# Altium PCB 24P_TO_15P_FPC_CSI_ADAPTER.PcbDoc
Units mm, origin at the board's own origin, x right, y up, seen from the top; angles counter-clockwise.
Board outline 34 x 38 mm, 4 copper layers (Top Layer, Mid Layer 1, Mid Layer 2, Bottom Layer), stack 1.586 mm thick; 15 components, 16 nets, 90 pads, 40 vias.
Unrouted connection lines stored in the file: 6.
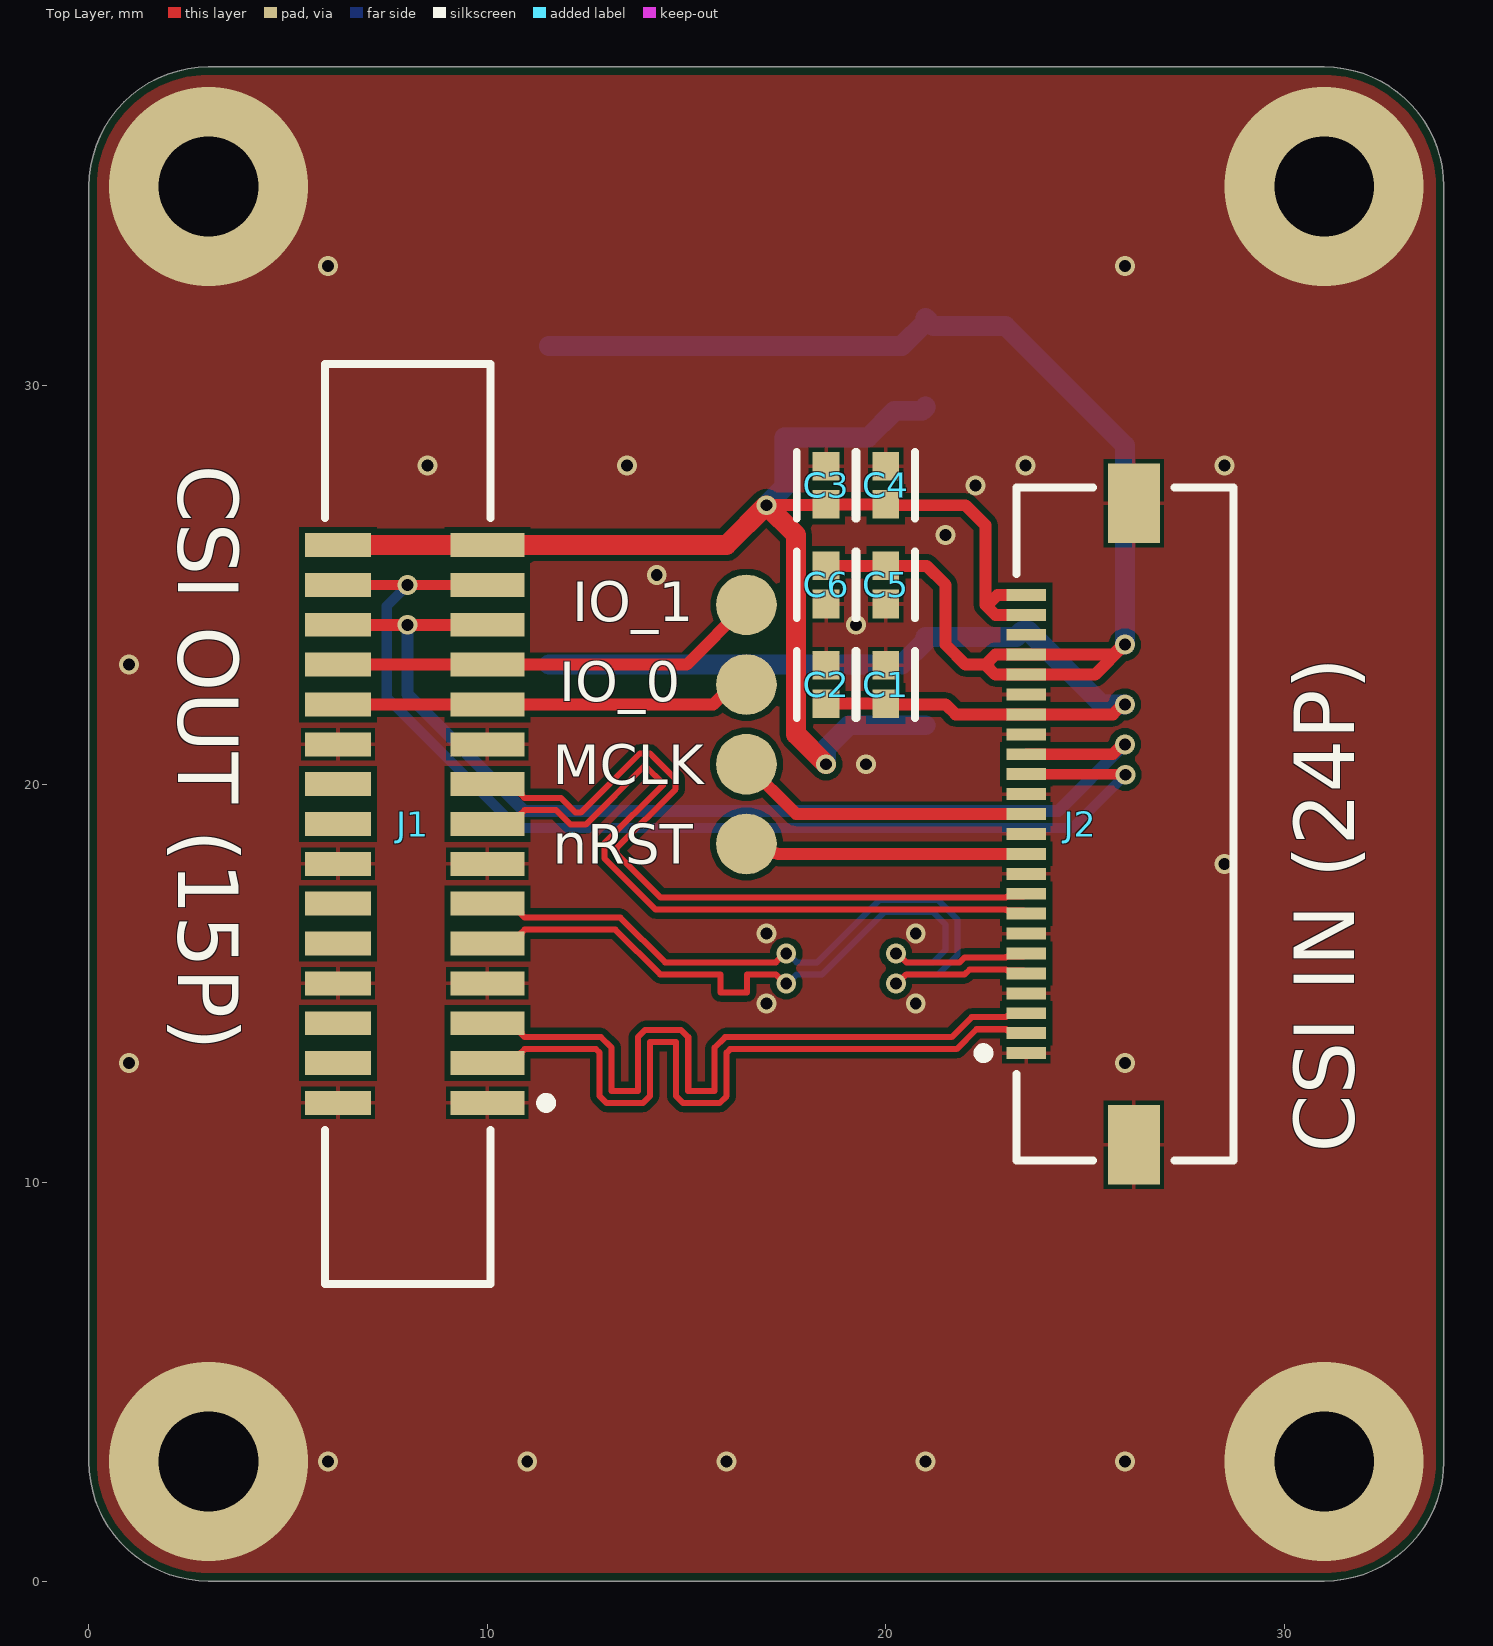
[diagram p0: Top Layer view]
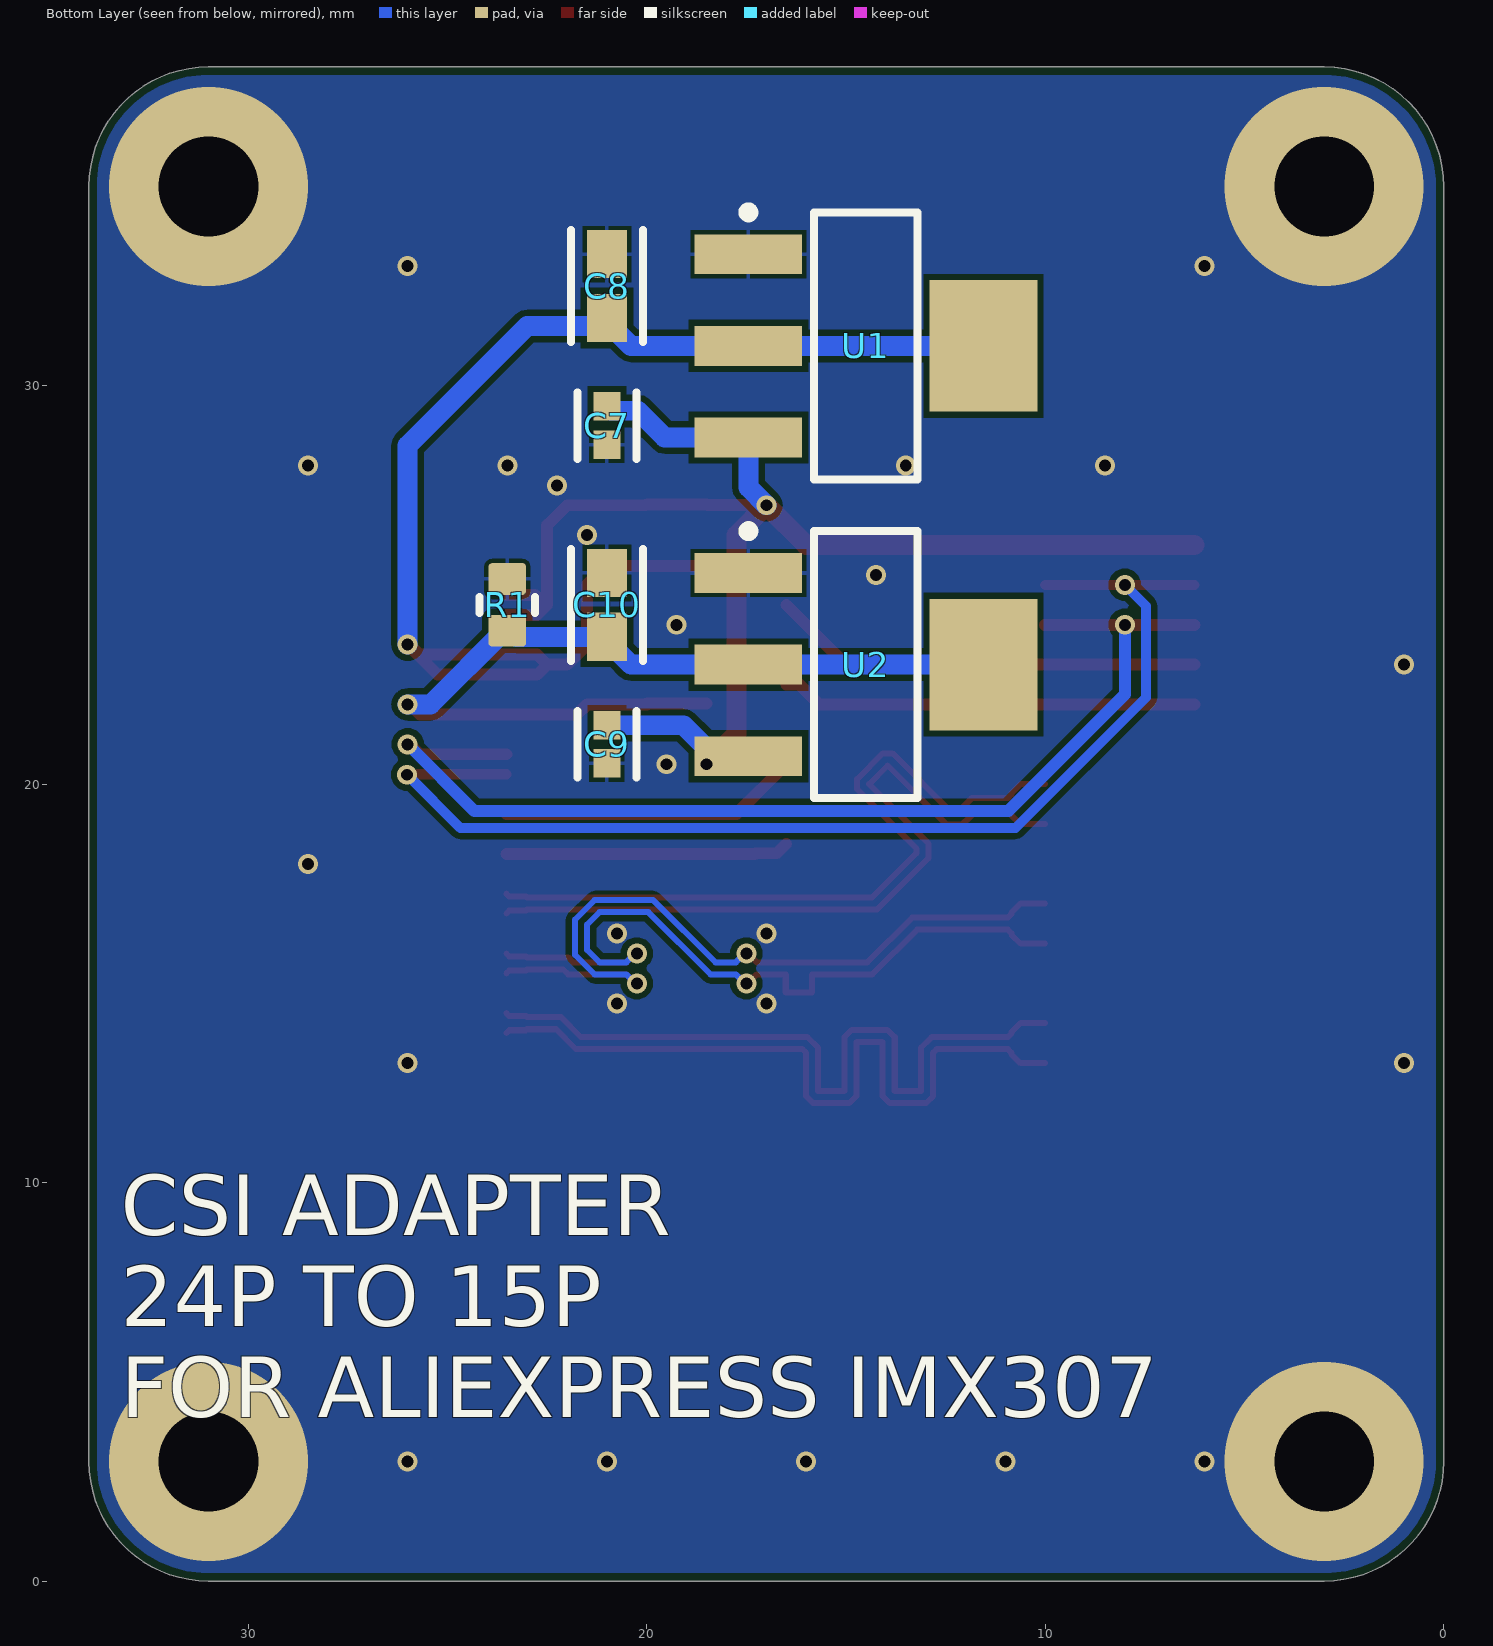
[diagram p1: Bottom Layer view, seen from below]
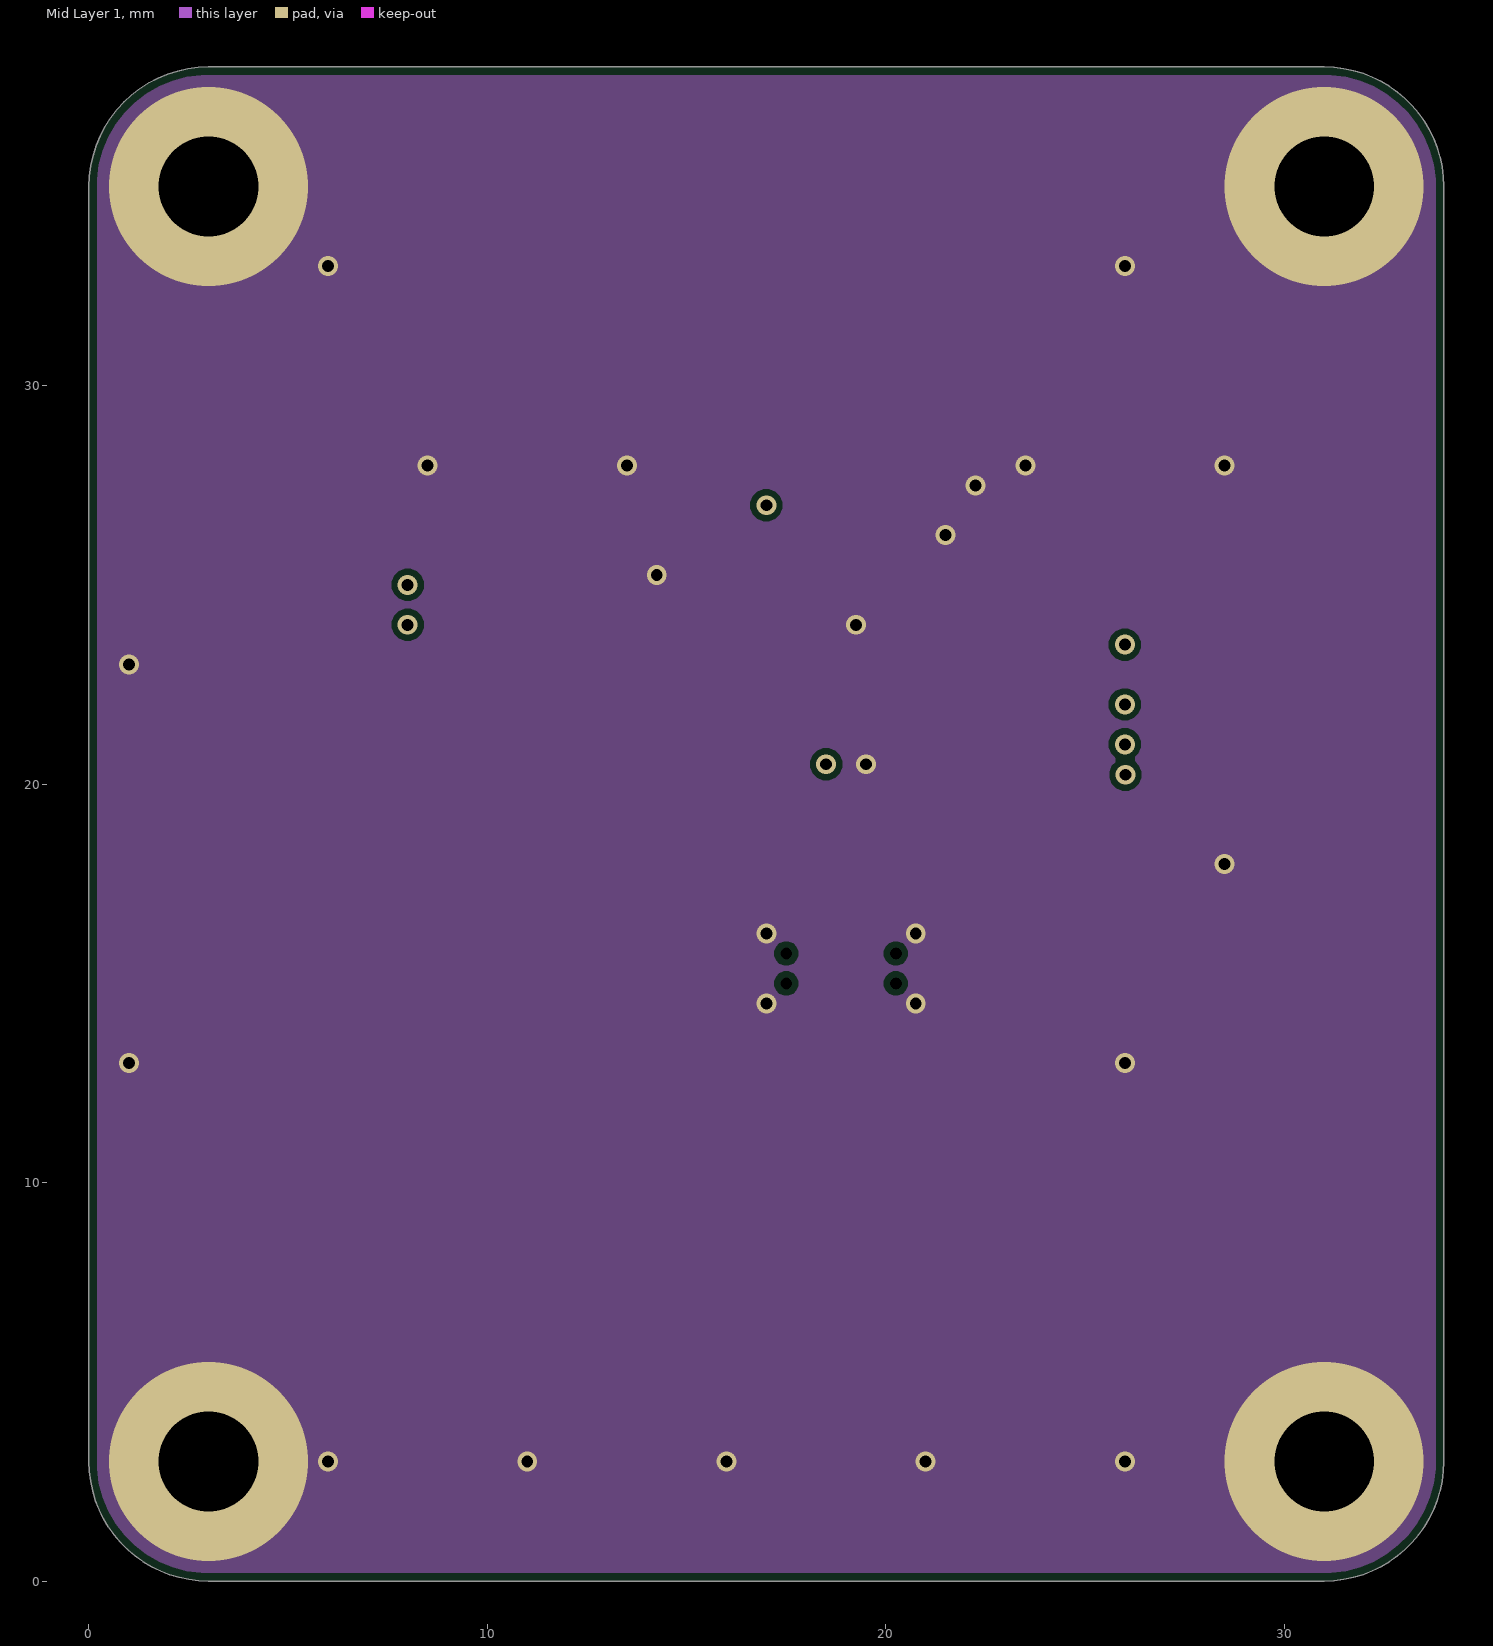
[diagram p2: Mid Layer 1]
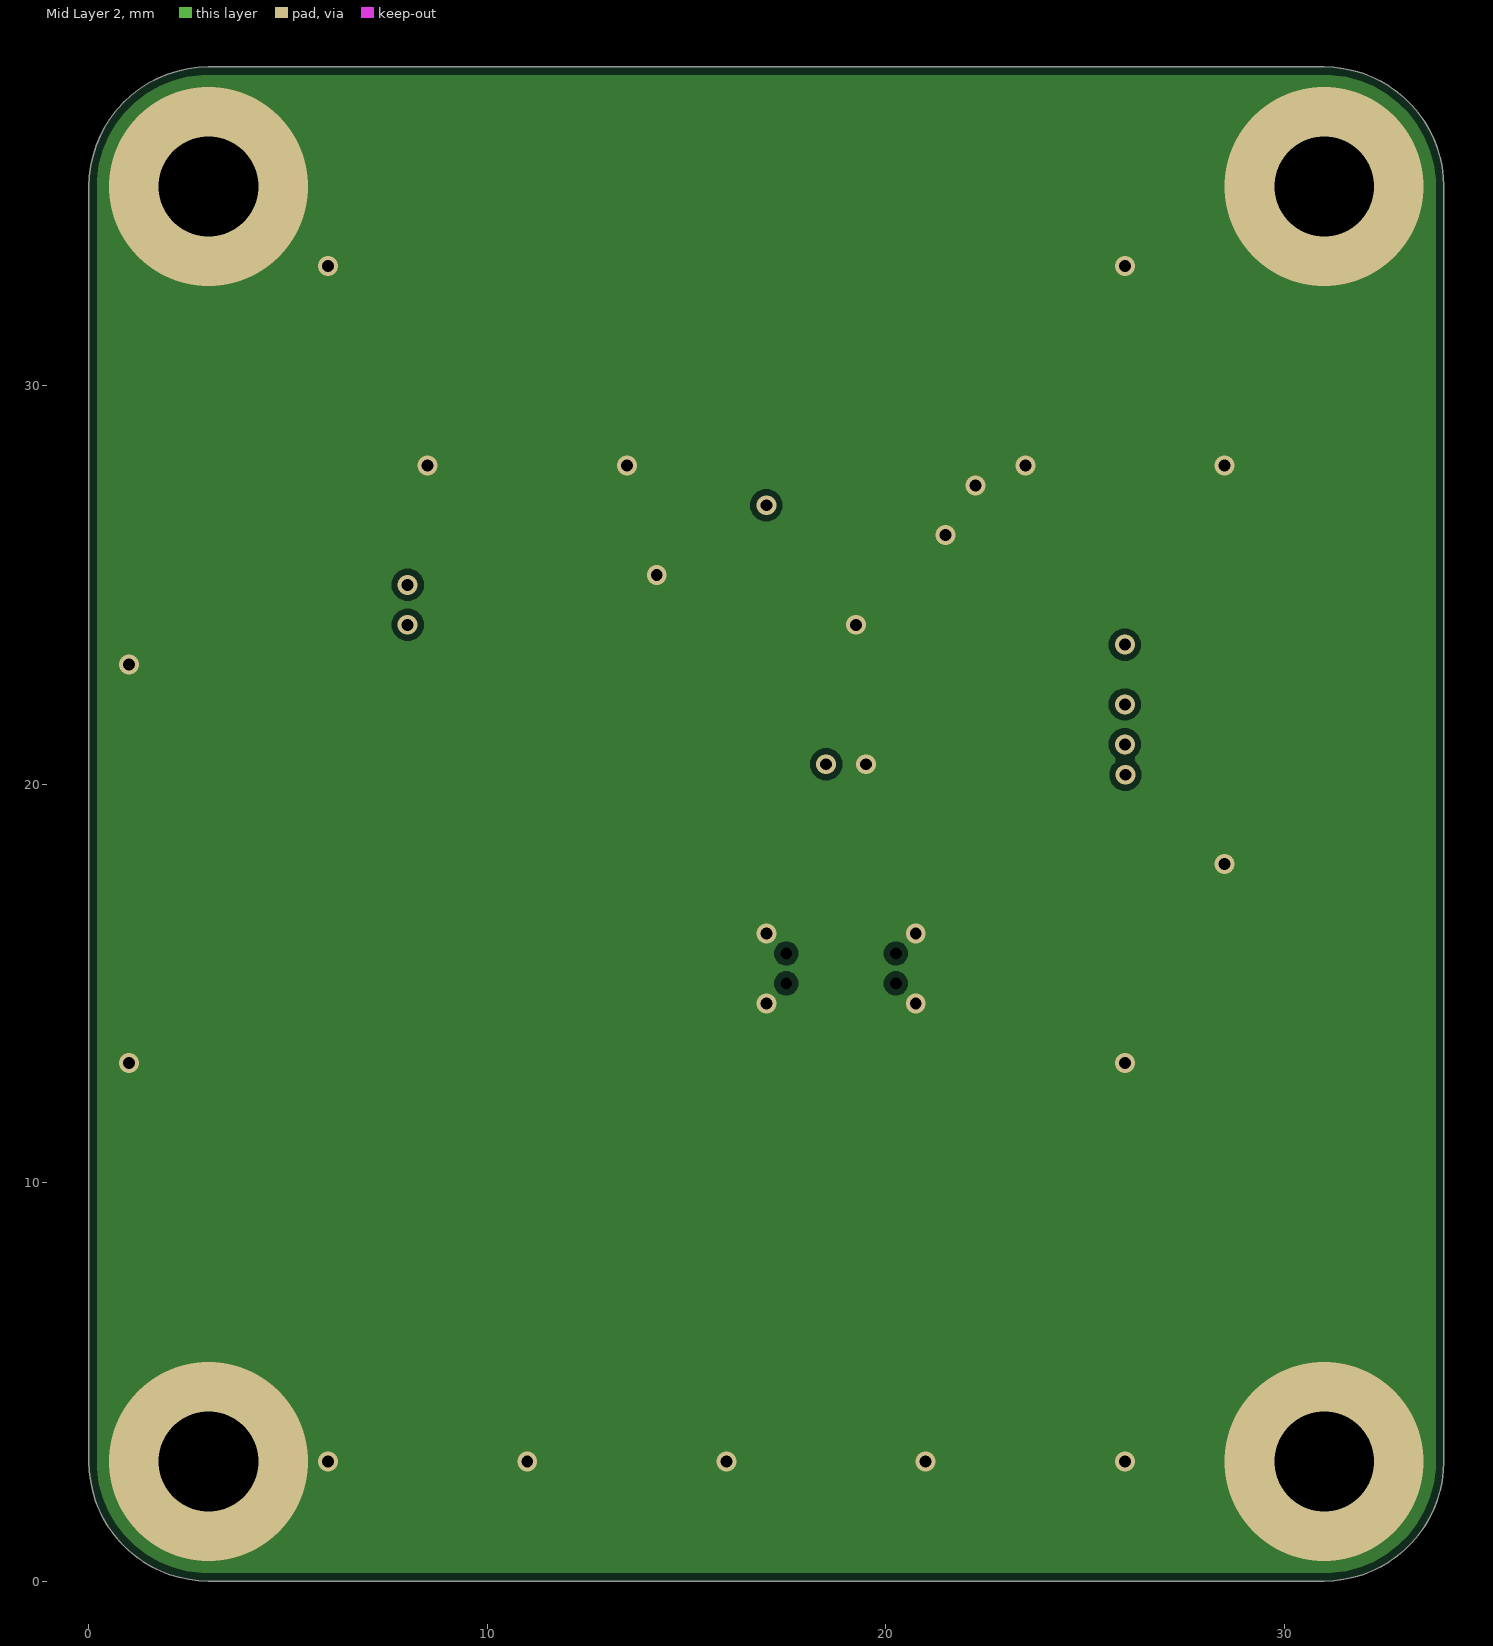
[diagram p3: Mid Layer 2]
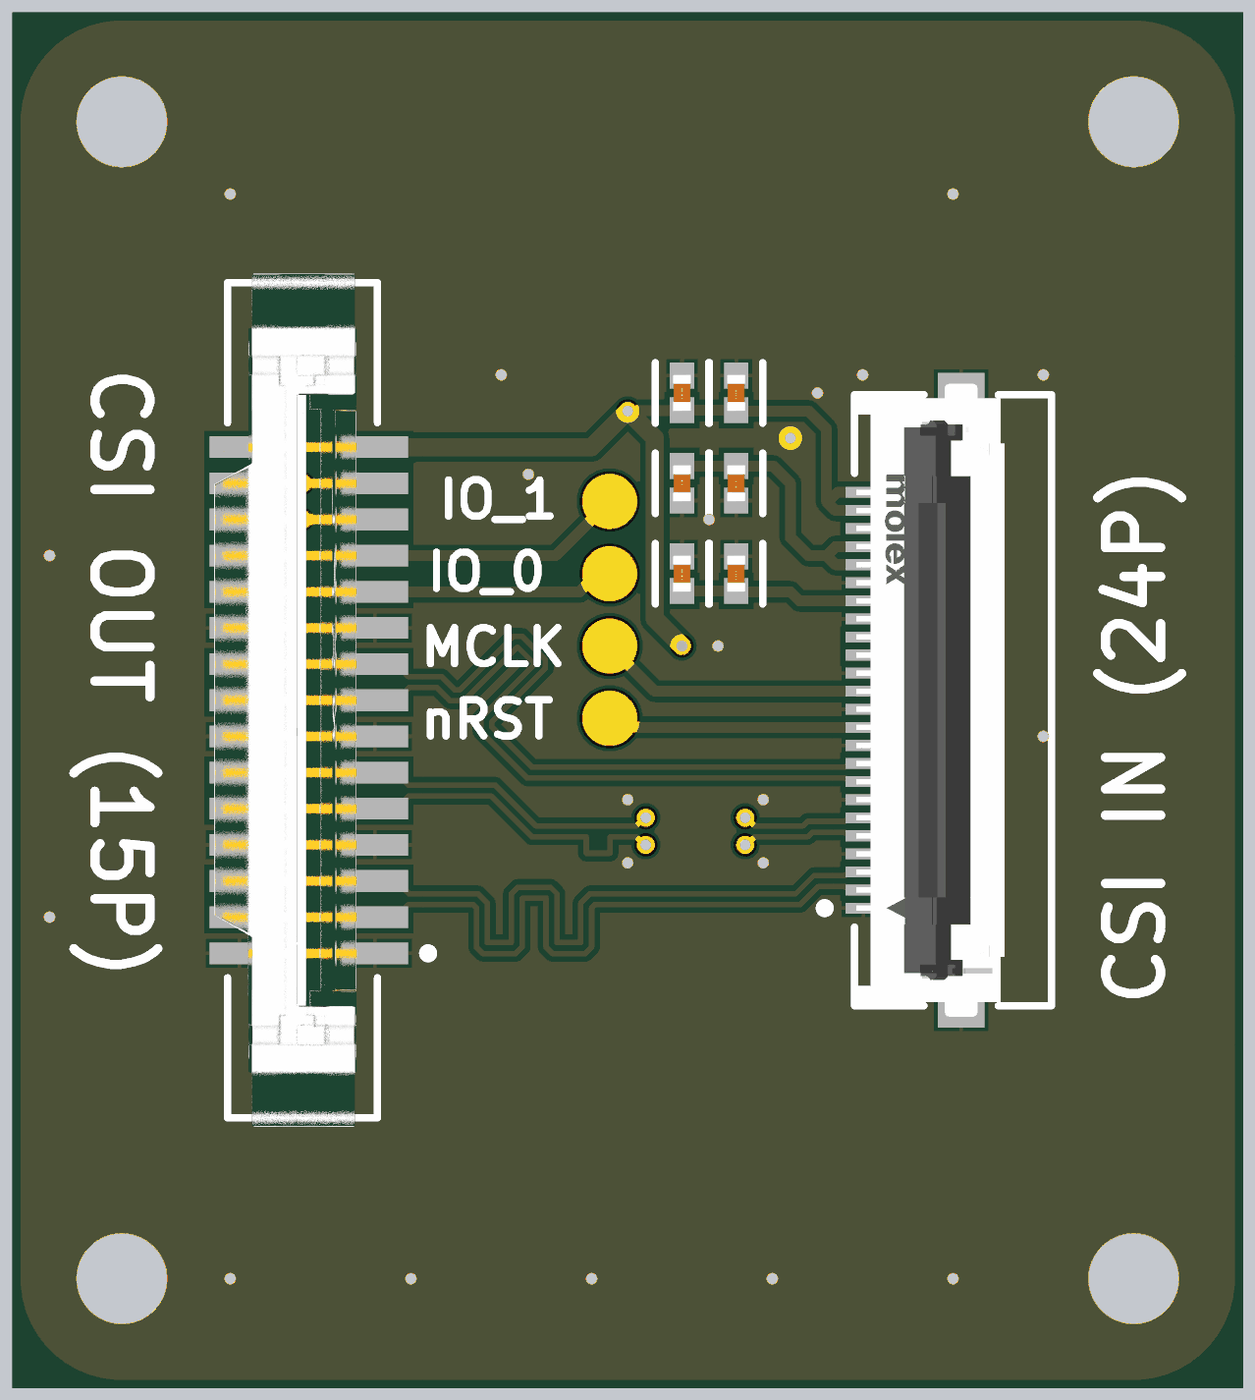
[diagram p4: 3D render of the assembled board from above, using the file's embedded part models]
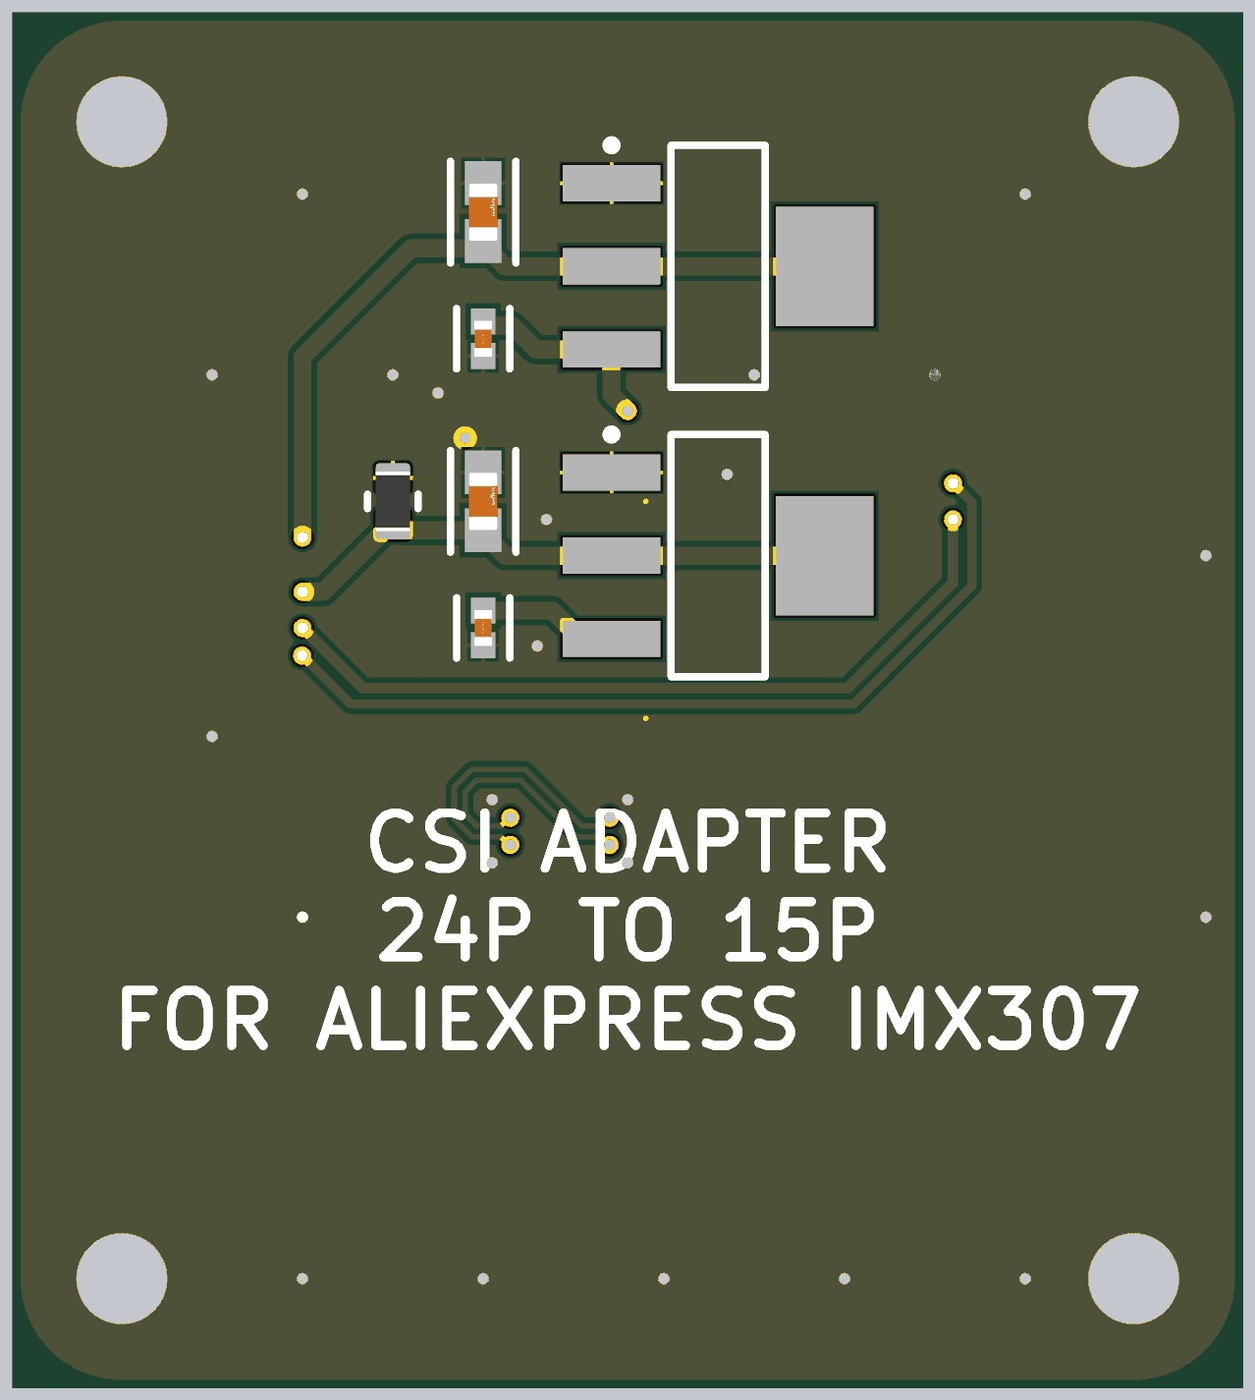
[diagram p5: 3D render of the assembled board from below, using the file's embedded part models]

## Layer stack, top to bottom
Top Solder: solder mask 0.0127, Solder Resist, Dk 3.8
Top Layer: signal copper 0.035
Dielectric 1: prepreg 0.2104, 7628, Dk 4.6
Mid Layer 1: signal copper 0.0152
Core: core 1.065, FR-4, Dk 4.5
Mid Layer 2: signal copper 0.0152
Dielectric 2: prepreg 0.2104, 7628, Dk 4.6
Bottom Layer: signal copper 0.035
Bottom Solder: solder mask 0.0127, Solder Resist, Dk 3.8

## Board outline
0,3 ccw(c3,3) 3,0 31,0 ccw(c31,3) 34,3 34,35 ccw(c31,35) 31,38 3,38 ccw(c3,35) 0,35

## Design rules (kind name [scope] priority, off if disabled: settings)
BoardOutlineClearance [All] p1: gap=0.2 ignorepadtopadclearanceinfootprint=FALSE
Clearance [All] p1: gap=0.15 ignorepadtopadclearanceinfootprint=FALSE
ComponentClearance [All] p1: gap=0.102 collisioncheckmode=3 verticalgap=0.102 showdistances=TRUE
DiffPairsRouting [InDifferentialPairClass('CSI')] p1: maxlimit=0.15 minlimit=0.127 mostfreqgap=0.15 toplayer_mingap=0.15 toplayer_minwidth=0.152 toplayer_maxwidth=0.152 toplayer_prefwidth=0.152 midlayer1_maxgap=0.127 midlayer1_prefgap=0.127 midlayer1_minwidth=0.107 midlayer1_maxwidth=0.107 midlayer1_prefwidth=0.107 midlayer2_maxgap=0.127 midlayer2_prefgap=0.127 midlayer2_minwidth=0.107 midlayer2_maxwidth=0.107 midlayer2_prefwidth=0.107 bottomlayer_mingap=0.15 bottomlayer_minwidth=0.152 bottomlayer_maxwidth=0.152 bottomlayer_prefwidth=0.152 impedanceprofiledriven=TRUE impedanceprofileid={FFC9BC41-F732-48F3-88DE-656A0ADEF5C8} impedanceprofilevalue=100.000000 maxuncoupledlength=12.7
DiffPairsRouting DiffPairsRouting_1 [All] p2: maxlimit=0.254 minlimit=0.254 mostfreqgap=0.254 toplayer_minwidth=0.381 toplayer_maxwidth=0.381 toplayer_prefwidth=0.381 midlayer1_minwidth=0.381 midlayer1_maxwidth=0.381 midlayer1_prefwidth=0.381 midlayer2_minwidth=0.381 midlayer2_maxwidth=0.381 midlayer2_prefwidth=0.381 bottomlayer_minwidth=0.381 bottomlayer_maxwidth=0.381 bottomlayer_prefwidth=0.381 maxuncoupledlength=12.7
Height [All] p1: minheight=0 maxheight=1816.048 prefheight=12.7
HoleSize [All] p1: absolutevalues=TRUE maxlimit=6.3 minlimit=0.2 maxpercent=80.000 minpercent=20.000
HoleToHoleClearance [All] p1: gap=0.25 allowstackedmicrovias=FALSE
MatchedLengths CSI_INTER [InDifferentialPairClass('CSI')] p1: tolerance=25.4 checknetsindiffpair=FALSE checkdiffpairvsdiffpair=TRUE checkxsignals=TRUE checkothers=TRUE usedelayunits=TRUE delaytolerance=5.000000
MatchedLengths CSI_INTRA [InDifferentialPairClass('CSI')] p2: tolerance=25.4 checknetsindiffpair=TRUE checkdiffpairvsdiffpair=FALSE checkxsignals=FALSE checkothers=FALSE usedelayunits=TRUE delaytolerance=1.000000
MinimumAnnularRing [All] p1: minimumring=0.076
MinimumSolderMaskSliver [All] p1: minsoldermaskwidth=0
PlaneClearance [All] p1: clearance=0.102
PlaneConnect PlaneConnectPowerPads [InPadClass('PowerPads')] p1: planeconnectstyle=Direct reliefexpansion=0.508 reliefentries=4 reliefconductorwidth=0.254 reliefairgap=0.254
PlaneConnect [All] p2: pad.planeconnectstyle=Relief pad.reliefexpansion=0.3 pad.reliefentries=4 pad.reliefconductorwidth=0.102 pad.reliefairgap=0.102 via.planeconnectstyle=Direct via.reliefexpansion=0.3 via.reliefentries=4 via.reliefconductorwidth=0.127 via.reliefairgap=0.127
PolygonConnect PolygonConnectPowerPads [All vs (InPadClass('PowerPads'))] p1: connectstyle=Direct reliefconductorwidth=0.254 reliefentries=4 polygonreliefangle="90 Angle" airgapwidth=0.254
PolygonConnect [All] p2: thpad.connectstyle=Relief thpad.reliefconductorwidth=0.102 thpad.reliefentries=4 thpad.polygonreliefangle="90 Angle" thpad.airgapwidth=0.102 smdpad.connectstyle=Relief smdpad.reliefconductorwidth=0.102 smdpad.reliefentries=4 smdpad.polygonreliefangle="90 Angle" smdpad.airgapwidth=0.102 via.connectstyle=Direct via.reliefconductorwidth=0.127 via.reliefentries=4 via.polygonreliefangle="90 Angle" via.airgapwidth=0.127
RoutingVias [All] p1: holewidth=0.2 width=0.45 viastyle="Through Hole" minholewidth=0.2 minwidth=0.45 maxholewidth=6.3 maxwidth=6.55
SilkToSilkClearance [All] p1: silktosilkclearance=0
SilkToSolderMaskClearance [IsPad] p1: minsilkscreentomaskgap=0.102 clearancetoexposedcopper=TRUE
SolderMaskExpansion [All] p1: expansion=0.075 istentingtop=FALSE
SupplyNets "Schematic Supply Nets_1" [InNet('3V3_AUX')] p1: voltage=0.000
SupplyNets "Schematic Supply Nets" [InNet('GND')] p2: voltage=0.000
Width [All] p1: maxlimit=1816.048 minlimit=0.102 preferedwidth=0.102
20 further rules are at their usual default settings.

## Classes and differential pairs
differential pair class CSI: CSI_CK CSI_D0 CSI_D1
differential pair CSI_D1: +CSI_D1_P -CSI_D1_N
differential pair CSI_D0: +CSI_D0_P -CSI_D0_N
differential pair CSI_CK: +CSI_CK_P -CSI_CK_N

## Components (designator, comment, footprint, x,y, rotation, side; value= is the part's Value field where it differs from the comment)
C1 "100n" FP-0402-L_1_0_0_05-W_0_5-IPC_A 20,22.5 r270 top
C2 "10u" FP-0402-L_1_0_0_05-W_0_5-IPC_A 18.5,22.5 r270 top
C3 "10u" FP-0402-L_1_0_0_05-W_0_5-IPC_A 18.5,27.5 r270 top
C4 "100n" FP-0402-L_1_0_0_05-W_0_5-IPC_A 20,27.5 r270 top
C5 "100n" FP-0402-L_1_0_0_05-W_0_5-IPC_A 20,25 r90 top
C6 "10u" FP-0402-L_1_0_0_05-W_0_5-IPC_A 18.5,25 r90 top
C7 "100n" FP-0402-L_1_0_0_05-W_0_5-IPC_A 21,29 r90 bottom
C8 "GRM188R60J106ME47D" FP-GRM188-0_1-e0_2_0_55-IPC_A 21,32.5 r90 bottom
C9 "100n" FP-0402-L_1_0_0_05-W_0_5-IPC_A 21,21 r90 bottom
C10 "GRM188R60J106ME47D" FP-GRM188-0_1-e0_2_0_55-IPC_A 21,24.5 r90 bottom
J1 "1-1734248-5" FP-1-1734248-5-MFG 8,19 r270 top
J2 "505110-2491" FP-505110-2491-MFG 26,19 r90 top
R1 "120" R0603B 23.5,24.5 r270 bottom
U1 "LD1117S18TR" SOT-223_M 14.5,31 r180 bottom
U2 "LD1117S12TR" SOT-223_M 14.5,23 r180 bottom

## Footprints (in the part's own frame and the unit in brackets; to place one, negate y for a bottom-side part, rotate by r counter-clockwise, add the part's x,y. Pads: shape width x height; smd on the part's side, far side on the other; paste and mask are expansions set on the pad)
FP-1-1734248-5-MFG [mm]
  rect 0.6x1.65 smd paste+0 mask+0: 1(7,-1.75) 2(6,-1.75) 3(5,-1.75) 4(4,-1.75) 5(3,-1.75) 6(2,-1.75) 7(1,-1.75) 8(0,-1.75) 9(-1,-1.75) 10(-2,-1.75) 11(-3,-1.75) 12(-4,-1.75) 13(-5,-1.75) 14(-6,-1.75) 15(-7,-1.75)
  rect 0.6x1.85 smd paste+0 mask+0: 1(7,2) 2(6,2) 3(5,2) 4(4,2) 5(3,2) 6(2,2) 7(1,2) 8(0,2) 9(-1,2) 10(-2,2) 11(-3,2) 12(-4,2) 13(-5,2) 14(-6,2) 15(-7,2)
  silkscreen extent -11.55,-2.07 11.55,3.6, body extent -11.65,-2.67 11.65,3.02, height 0.25
FP-0402-L_1_0_0_05-W_0_5-IPC_A [mm]
  rect 0.715x0.672 smd paste+0 mask+0: 1(-0.479,0) 2(0.479,0)
  silkscreen extent -0.84,-0.74 0.84,0.74, body extent -1.04,-0.54 1.04,0.54, height 0.25
FP-505110-2491-MFG [mm]
  rect 0.3x1 smd paste+0 mask+0: 1(-5.75,2.475) 2(-5.25,2.475) 3(-4.75,2.475) 4(-4.25,2.475) 5(-3.75,2.475) 6(-3.25,2.475) 7(-2.75,2.475) 8(-2.25,2.475) 9(-1.75,2.475) 10(-1.25,2.475) 11(-0.75,2.475) 12(-0.25,2.475) 13(0.25,2.475) 14(0.75,2.475) 15(1.25,2.475) 16(1.75,2.475) 17(2.25,2.475) 18(2.75,2.475) 19(3.25,2.475) 20(3.75,2.475) 21(4.25,2.475) 22(4.75,2.475) 23(5.25,2.475) 24(5.75,2.475)
  rect 2x1.3 smd paste+0 mask+0: 25(-8.05,-0.225) 26(8.05,-0.225)
  silkscreen extent -8.45,-2.73 8.45,3.67, body extent -9.15,-2.83 9.15,3.08, height 0.25
FP-GRM188-0_1-e0_2_0_55-IPC_A [mm]
  rect 1.208x1.012 smd paste+0 mask+0: 1(-0.802,0) 2(0.802,0)
  silkscreen extent -1.41,-0.91 1.41,0.91, body extent -0.8,-0.4 0.8,0.4, height 0.9
R0603B [mm] "Chip Resistor, 0603, 2-Leads, Body 1.58x0.85mm, IPC Medium Density"
  rrect25% 0.8x0.95 smd: 1(-0.65,0) 2(0.65,0)
  silkscreen extent -0.2,-0.7 0.2,0.7, body extent -0.82,-0.48 0.82,0.48, height 0.5
SOT-223_M [mm] "SOT223, 4-Leads, Body 6.5x3.5mm, Pitch 2.3mm, Lead Span 7mm, IPC Low Density"
  rect 2.7x1 smd: 1(-2.95,2.3) 2(-2.95,0) 3(-2.95,-2.3)
  rect 2.7x3.3 smd: 4(2.95,0)
  silkscreen extent -3.08,-3.35 1.3,3.47, body extent -1.85,-3.35 1.85,3.35, height 1.8

## Part data
C1 C2 C3 C4 C5 C6 C7 C9: library part CMP-001-00058-1, "LARGE PADS, 0402 CAP, CHANGE COMMENT TO MATCH REAL P/N", Capacitor Type=Ceramic, Case/Package=0402, Max Operating Temperature=85°C, Min Operating Temperature=-55°C, Mounting Technology="Surface Mount", Pins=2, RoHS Compliant=Yes
C8 C10: library part CMP-2006-02792-2, "Chip Multilayer Ceramic Capacitors for General Purpose, 0603, 10uF, X5R, 15%, 20%, 6.3V", Capacitance=10uF, Case Code (Imperial)=0603, Case Code (Metric)=1608, Dielectric=X5R, Max Operating Temperature=85°C, Min Operating Temperature=-55°C, Package Quantity=4000, Tolerance=20%, Voltage=6.3V, Case/Package=0603, Depth=0.8mm, Height=0.8mm, Lead Free="Lead Free", Length=1.6mm, Material=Ceramic, Mount="Surface Mount", Packaging="Tape and Reel", Radiation Hardening=No, REACH SVHC="No SVHC", Termination=SMD/SMT, Thickness=0.035inch, Voltage Rating=6.3V, Voltage Rating (DC)=6.3V, Width=0.031inch
J1: library part CMP-03368-000001-1, "CONN FPC VERT 15POS 1.00MM SMD", Current Rating=1A, Manufacturer=TE, Package=0, Temperature="-20°C to +85°C", Temperature Range High=+85°C, Temperature Range Low=-20°C, Voltage Rating=125V, Automotive=No, Category=Conn, ComponentLink2Description=Datasheet, ComponentLink2URL=https://www.te.com/commerce/DocumentDelivery/DDEController?Action=showdoc&DocId=Customer+Drawing%7F1734248%7FE1%7Fpdf%7FEnglish%7FENG_CD_1734248_E1__.pdf%7F1-1734248-5, Conn Gender=Female, Conn Orientation=Vertical, Contact Material=Gold,Nickel, Device Class L1=Connectors, Device Class L2="FFC / FPC", Device Class L3=unset, Digikey Description="CONN FPC VERT 15POS 1.00MM SMD", Height=8mm, Is Female=yes, Lead Free=Yes, Manufacturer Part Number=1-1734248-5, Mounting Type="Surface Mount", Mouser Description="FFC & FPC Connectors 15P 1.0 FPC, Zip V/T SMT", Number of Contacts=15, Octopart=https://octopart.com/1-1734248-5-te+connectivity-40620898, Pitch=1mm, RoHS=TRUE
J2: library part CMP-04775-000015-1, "CONN FFC/FPC BOTTOM 24P .5MM R/A", Actuator Color=Black, Current Rating=500mA, Flammability Rating="UL94 V-0", Housing Color=Beige, Max Operating Temperature=105°C, Min Operating Temperature=-40°C, Voltage Rating=50V, Actuator Material=Nylon, Contact Material=Bronze, Contact Plating=Gold, Gender=Receptacle, Halogen Free="Low Halogen", Height=1.9mm, Housing Material=Polymer, Mating Cycles=25, Mount="Surface Mount", Number of Circuits=24, Number of Contacts=24, Number of Pins=24, Number of Positions=24, Number of Rows=1, Orientation="Right Angle", Packaging="Cut Tape", Pitch=0.5mm, Series="Easy-On FD19 505110", Termination=Solder
R1: library part CMP-009-00002-14, "Resistor"
U1: library part CMP-0244-00308-1, "Fixed Low Drop Positive Voltage Regulator, 1.8V, 4-Pin SOT-223, Tape and Reel", ComponentLink1Description="Manufacturer URL", ComponentLink1URL=http://www.st.com, ComponentLink2Description=Datasheet, ComponentLink2URL=http://www.st.com/internet/com/TECHNICAL_RESOURCES/TECHNICAL_LITERATURE/DATASHEET/CD00000544.pdf, DatasheetVersion=1/11/2011, PackageDescription="4-Pin SOT-223 Package, 6.5 x 3.5 mm Body, 2.3 mm Pitch, 7 mm Lead Span", PackageReference=SOT-223, PackageVersion=2010
U2: library part CMP-0244-00318-1, "Fixed Low Drop Positive Voltage Regulator, 1.2V, 4-Pin SOT-223, Tape and Reel", ComponentLink1Description="Manufacturer URL", ComponentLink1URL=http://www.st.com, ComponentLink2Description=Datasheet, ComponentLink2URL=http://www.st.com/internet/com/TECHNICAL_RESOURCES/TECHNICAL_LITERATURE/DATASHEET/CD00000544.pdf, DatasheetVersion=1/11/2011, PackageDescription="4-Pin SOT-223 Package, 6.5 x 3.5 mm Body, 2.3 mm Pitch, 7 mm Lead Span", PackageReference=SOT-223, PackageVersion=2010

## Free pads (board coordinates)
  round 1.524 / inner round 0 / far side round 0 all layers, no hole: 2(16.5,22.5) 2(16.5,24.5) 2(16.5,18.5) 2(16.5,20.5)

## Via types
v1: diameter 0.5, hole 0.3, Top Layer to Bottom Layer, tented both sides, 23 vias
v2: diameter 0.5, hole 0.3, Top Layer to Bottom Layer, 9 vias
v3: diameter 0.5/0/0/0.5 (per signal layer), hole 0.3, Top Layer to Bottom Layer, 4 vias
v4: diameter 5, hole 2.5, Top Layer to Bottom Layer, tented both sides, 4 vias

## Nets (pads, with @x,y where several pads share a name; then routed paths per layer and width w, separated by ;. In a path a pad name is that pad's centre, name@x,y a point inside that pad or via, vN(x,y) a via of type N, cw(c..) or ccw(c..) an arc to the next point about the centre after c; other vN are vias at no path point)
3V3_AUX: C3.2 C4.2 C7.2 C9.2 J1.15 J2.23 J2.24 U1.3 U2.3 | length 37.1
  Top Layer w0.3: v2(17,27) 17.011,27.011 18.489,27.011 C3.2 C4.2 20.021,27 22,27 22.5,26.5 22.5,24.5 22.75,24.25 J2.23 ; 22.554,24.5 22.804,24.75 J2.24
  Top Layer w0.5: J1.15@6.25,26 10,26 16,26 v2(17,27) 17.75,26.25 17.75,21.25 v2(18.5,20.5)
  Bottom Layer w0.5: v2(17,27) 17.45,27.45 U1.3 19.55,28.7 20.221,29.371 20.914,29.371 21,29.457 C7.2 ; v2(18.5,20.5) 18.5,20.9 19.079,21.479 C9.2
CAM_1V2: C1.2 C2.2 C10.1 J2.18 R1.2 U2.2 U2.4 | length 23.3
  Top Layer w0.3: C2.2 C1.2 ; C1.2@20,22 21.5,22 21.75,21.75 J2.18 25.696,21.75 25.946,22 v2(26,22)
  Bottom Layer w0.5: U2.4 U2.2 20.4,23 21,23.6 C10.1 23.273,23.698 23.425,23.85 R1.2 23.575,23.85 25.425,22 v2(26,22)
CAM_1V8: C5.2 C6.2 C8.1 J2.20 J2.21 U1.2 U1.4 | length 34.6
  Top Layer w0.3: C6.2 C5.2 21.021,25.479 21.5,25 21.5,23.5 22,23 22.5,23 ; 22.5,23 22.75,22.75 J2.20 25.25,22.75 v2(26,23.5) 25.946,23.5 25.696,23.25 J2.21 22.75,23.25 22.5,23
  Bottom Layer w0.5: U1.4 U1.2 20.4,31 21,31.6 C8.1 21.198,31.5 23,31.5 26,28.5 v2(26,23.5)
CAM_IO0: J1.11 pad.2@16.5,22.5 | length 10.5
  Top Layer w0.3: J1.11@6.25,22 10,22 15.669,22 16.169,22.5 pad.2@16.5,22.5
CAM_IO1: J1.12 pad.2@16.5,24.5 | length 10.9
  Top Layer w0.3: J1.12@6.25,23 10,23 15,23 pad.2@16.5,24.5
CAM_MCLK: J2.13 pad.2@16.5,20.5 | length 7.5
  Top Layer w0.3: pad.2@16.5,20.5 17.75,19.25 J2.13
CAM_nRST: J2.11 pad.2@16.5,18.5 | length 7.1
  Top Layer w0.3: pad.2@16.5,18.5 16.734,18.266 17.272,18.266 17.288,18.25 J2.11
CAM_SCL: J1.13 J2.16 | length 28
  Top Layer w0.3: J1.13@6.25,24 v2(8,24) J1.13@10,24 ; J2.16 25.696,20.75 25.946,21 v2(26,21)
  Bottom Layer w0.3: v2(8,24) 8,22.25 10.923,19.327 24.327,19.327 v2(26,21)
CAM_SDA: J1.14 J2.15 | length 29.7
  Top Layer w0.254: J1.14@6.25,25 v2(8,25) J1.14@10,25 ; J2.15 26,20.25 v2(26.014,20.236)
  Bottom Layer w0.254: v2(8,25) 7.473,24.473 7.473,22.173 10.746,18.9 24.678,18.9 v2(26.014,20.236)
CSI_CK_N: J1.8 J2.8 | length 19.2
  Top Layer w0.152: J1.8@10,19 10.625,19 10.849,19.224 10.849,19.26 10.938,19.349 11.724,19.349 11.887,19.187 12.091,18.982 12.467,18.982 13.954,20.469 14.421,20.002 12.934,18.515 12.934,18.139 14.211,16.862 14.224,16.849 23.012,16.849 23.037,16.824 23.451,16.824 J2.8
CSI_CK_P: J1.9 J2.9 | length 19.2
  Top Layer w0.152: J1.9@10,20 10.625,20 10.849,19.776 10.849,19.74 10.938,19.651 11.849,19.651 12.1,19.4 12.216,19.284 12.342,19.284 13.829,20.771 14.079,20.771 14.723,20.128 14.723,19.877 13.236,18.39 13.236,18.264 14.349,17.151 14.499,17.151 23.012,17.151 23.037,17.176 23.451,17.176 J2.9
CSI_D0_N: J1.2 J2.2 | length 19.2
  Top Layer w0.152: J1.2@10,13 10.625,13 10.849,13.224 10.849,13.26 10.938,13.349 11.6,13.349 12.726,13.349 12.815,13.26 12.815,12.171 12.992,11.994 13.902,11.994 14.079,12.171 14.079,13.526 14.739,13.526 14.739,12.171 14.916,11.994 15.826,11.994 16.002,12.171 16.002,13.26 16.091,13.349 17.123,13.349 21.776,13.349 22.276,13.849 23.012,13.849 23.037,13.824 23.451,13.824 J2.2
CSI_D0_P: J1.3 J2.3 | length 19.2
  Top Layer w0.152: J1.3@10,14 10.625,14 10.849,13.776 10.849,13.74 10.938,13.651 11.6,13.651 12.851,13.651 13.117,13.385 13.117,12.296 13.777,12.296 13.777,13.651 13.954,13.828 14.864,13.828 15.041,13.651 15.041,12.296 15.701,12.296 15.701,13.385 15.966,13.651 17.123,13.651 21.651,13.651 22.151,14.151 23.012,14.151 23.037,14.176 23.451,14.176 J2.3
CSI_D1_N: J1.5 J2.6 | length 19.6
  Top Layer w0.152: J1.5@10,16 10.625,16 10.849,16.224 10.849,16.26 10.938,16.349 13.213,16.349 14.338,15.224 15.116,15.224 15.852,15.224 15.852,14.768 16.512,14.768 16.512,15.224 17.013,15.224 17.237,15.224 17.461,15 v3(17.5,15) ; v3(20.25,15.75) 20.289,15.75 20.513,15.526 21.851,15.526 21.976,15.651 23.012,15.651 23.037,15.676 23.451,15.676 J2.6
  Bottom Layer w0.152: v3(17.5,15) 17.539,15 17.763,15.224 18.401,15.224 19.963,16.787 21.187,16.787 21.5,16.473 21.5,15.839 21.187,15.526 20.513,15.526 20.289,15.75 v3(20.25,15.75)
CSI_D1_P: J1.6 J2.5 | length 19.7
  Top Layer w0.152: J1.6@10,17 10.625,17 10.849,16.776 10.849,16.74 10.938,16.651 13.338,16.651 14.463,15.526 17.237,15.526 17.461,15.75 v3(17.5,15.75) ; v3(20.25,15) 20.289,15 20.513,15.224 21.976,15.224 22.101,15.349 23.012,15.349 23.037,15.324 23.451,15.324 J2.5
  Bottom Layer w0.152: v3(17.5,15.75) 17.539,15.75 17.763,15.526 18.276,15.526 19.838,17.088 21.312,17.088 21.802,16.598 21.802,15.714 21.312,15.224 20.513,15.224 20.289,15 v3(20.25,15)
GND: C1.1 C2.1 C3.1 C4.1 C5.1 C6.1 C7.1 C8.2 C9.1 C10.2 J1.1 J1.4 J1.7 J1.10 J2.1 J2.4 J2.7 J2.10 J2.12 J2.14 J2.17 J2.19 J2.25 J2.26 R1.1 U1.1 U2.1
  other v1: 6,3 11,3 16,3 21,3 26,3 1,13 26,13 17,14.5 20.75,14.5 17,16.25 20.75,16.25 28.5,18 19.5,20.5 1,23 19.25,24 14.25,25.25 22.25,27.5 8.5,28 13.5,28 23.5,28 28.5,28 6,33 26,33
  other v2: 21.5,26.25
  other v4: 3,3 31,3 3,35 31,35
pads on no net: J2.22

## Polygon pours and split planes (outlines as drawn)
GND on Mid Layer 1 "GND_L02_P002" (solid, remove dead copper, pour order 2): 0,3 0,35 cw(c3,35) 3,38 31,38 cw(c31,35) 34,35 34,3 cw(c31,3) 31,0 3,0 cw(c3,3)
GND on Mid Layer 2 "GND_L03_P001" (solid, remove dead copper, pour order 1): 0,3 0,35 cw(c3,35) 3,38 31,38 cw(c31,35) 34,35 34,3 cw(c31,3) 31,0 3,0 cw(c3,3)
GND on Bottom Layer "GND_L04_P000" (solid, remove dead copper, pour order 0): 0,3 0,35 cw(c3,35) 3,38 31,38 cw(c31,35) 34,35 34,3 cw(c31,3) 31,0 3,0 cw(c3,3)
GND on Top Layer "GND_L01_P003" (solid, remove dead copper, pour order 3): 0,3 0,35 cw(c3,35) 3,38 31,38 cw(c31,35) 34,35 34,3 cw(c31,3) 31,0 3,0 cw(c3,3)

## Silkscreen, mask and mechanical layers (free items; w line width, h text height)
Top Overlay:
  text "CSI OUT (15P)" at 2.238,28.014 h1.52 r270
  text "IO_1" at 12.134,24.083 h1
  text "IO_0" at 11.801,22.083 h1
  text "MCLK" at 11.635,20 h1
  text "nRST" at 11.635,18 h1
  text "CSI IN (24P)" at 31.762,10.748 h1.52 r90
Bottom Overlay:
  text "CSI ADAPTER / 24P TO 15P / FOR ALIEXPRESS IMX307" at 33.205,4.109 h1.52
Mechanical 1:
  the board outline again, w0.254